# Altium PCB PCB1.PcbDoc
Units mil, origin at the board's own origin, x right, y up, seen from the top; angles counter-clockwise.
Board outline 2885 x 2364.99 mil, 2 copper layers (Top Layer, Bottom Layer); 71 components, 41 nets, 241 pads, 20 vias.
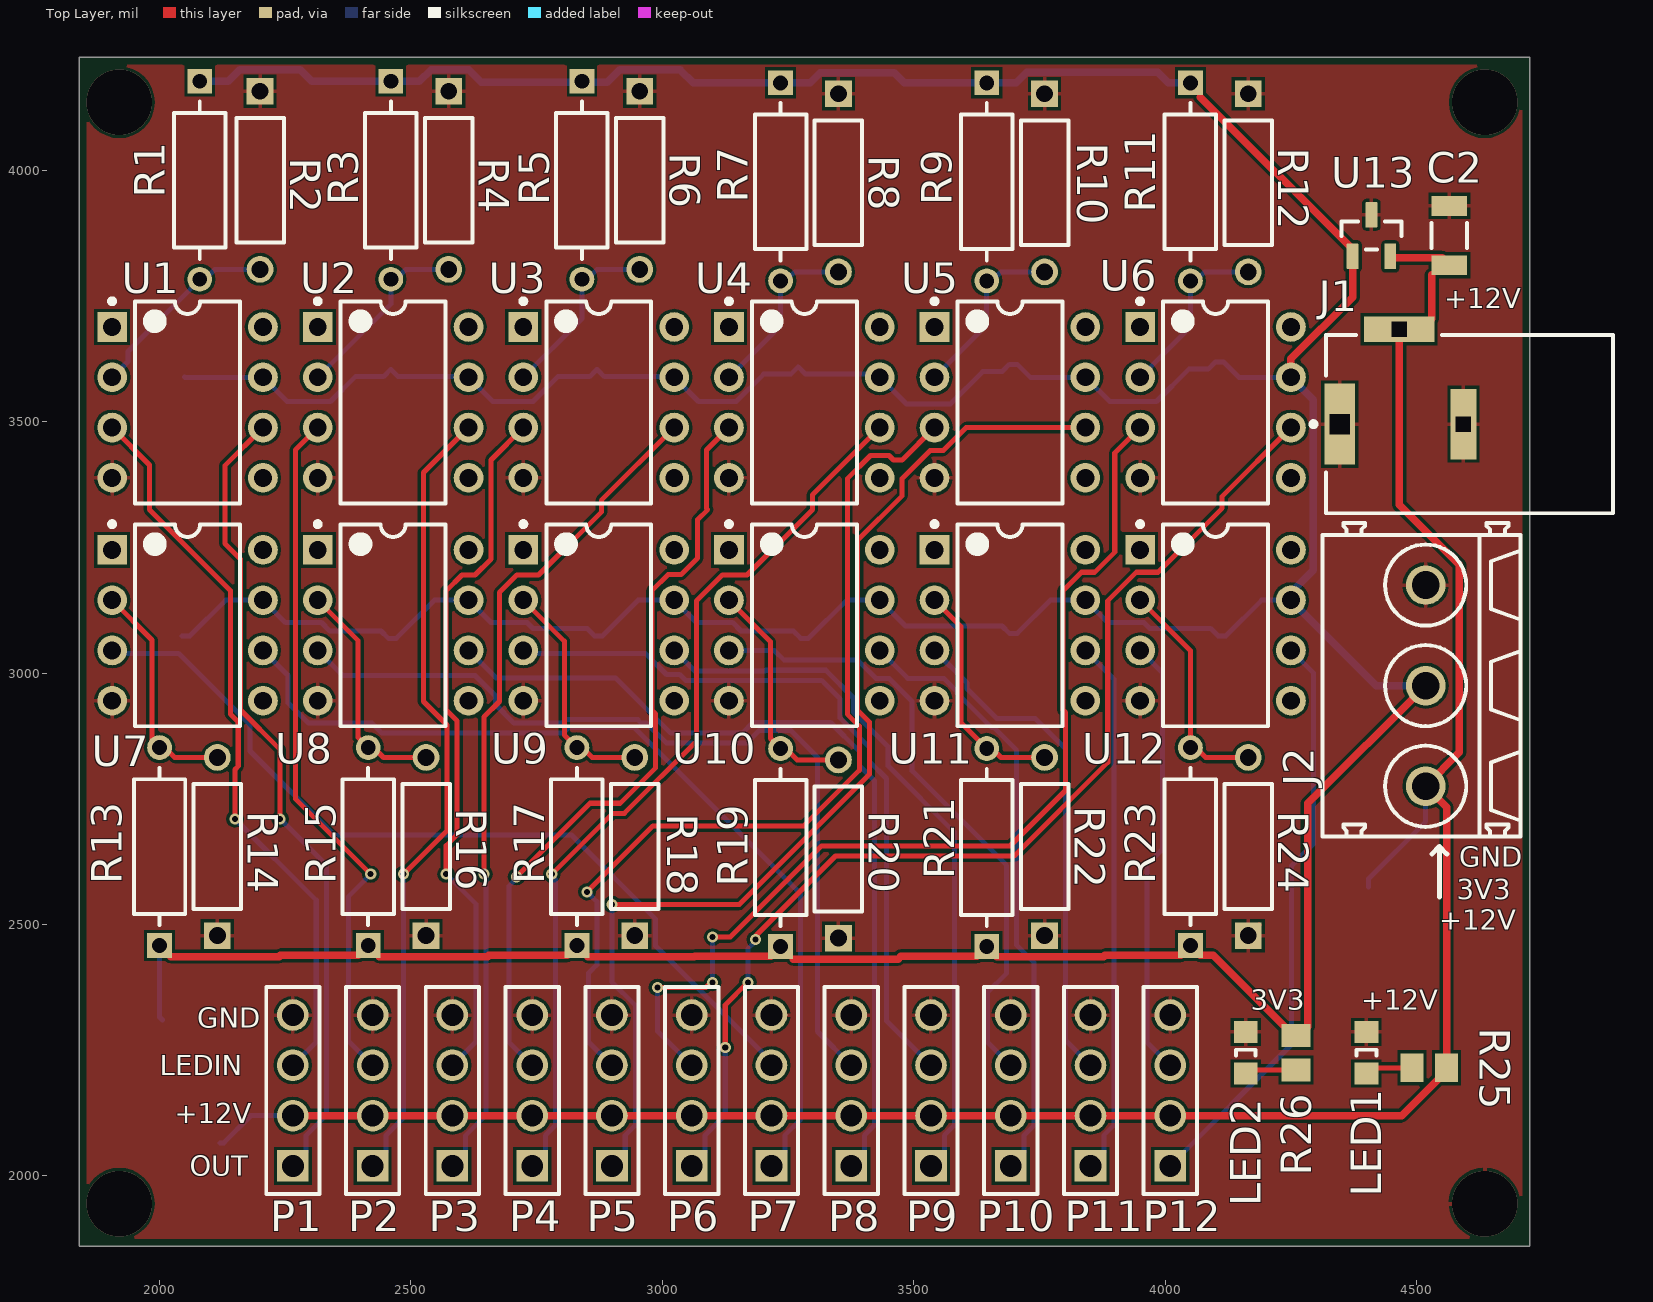
[diagram p0: Top Layer view]
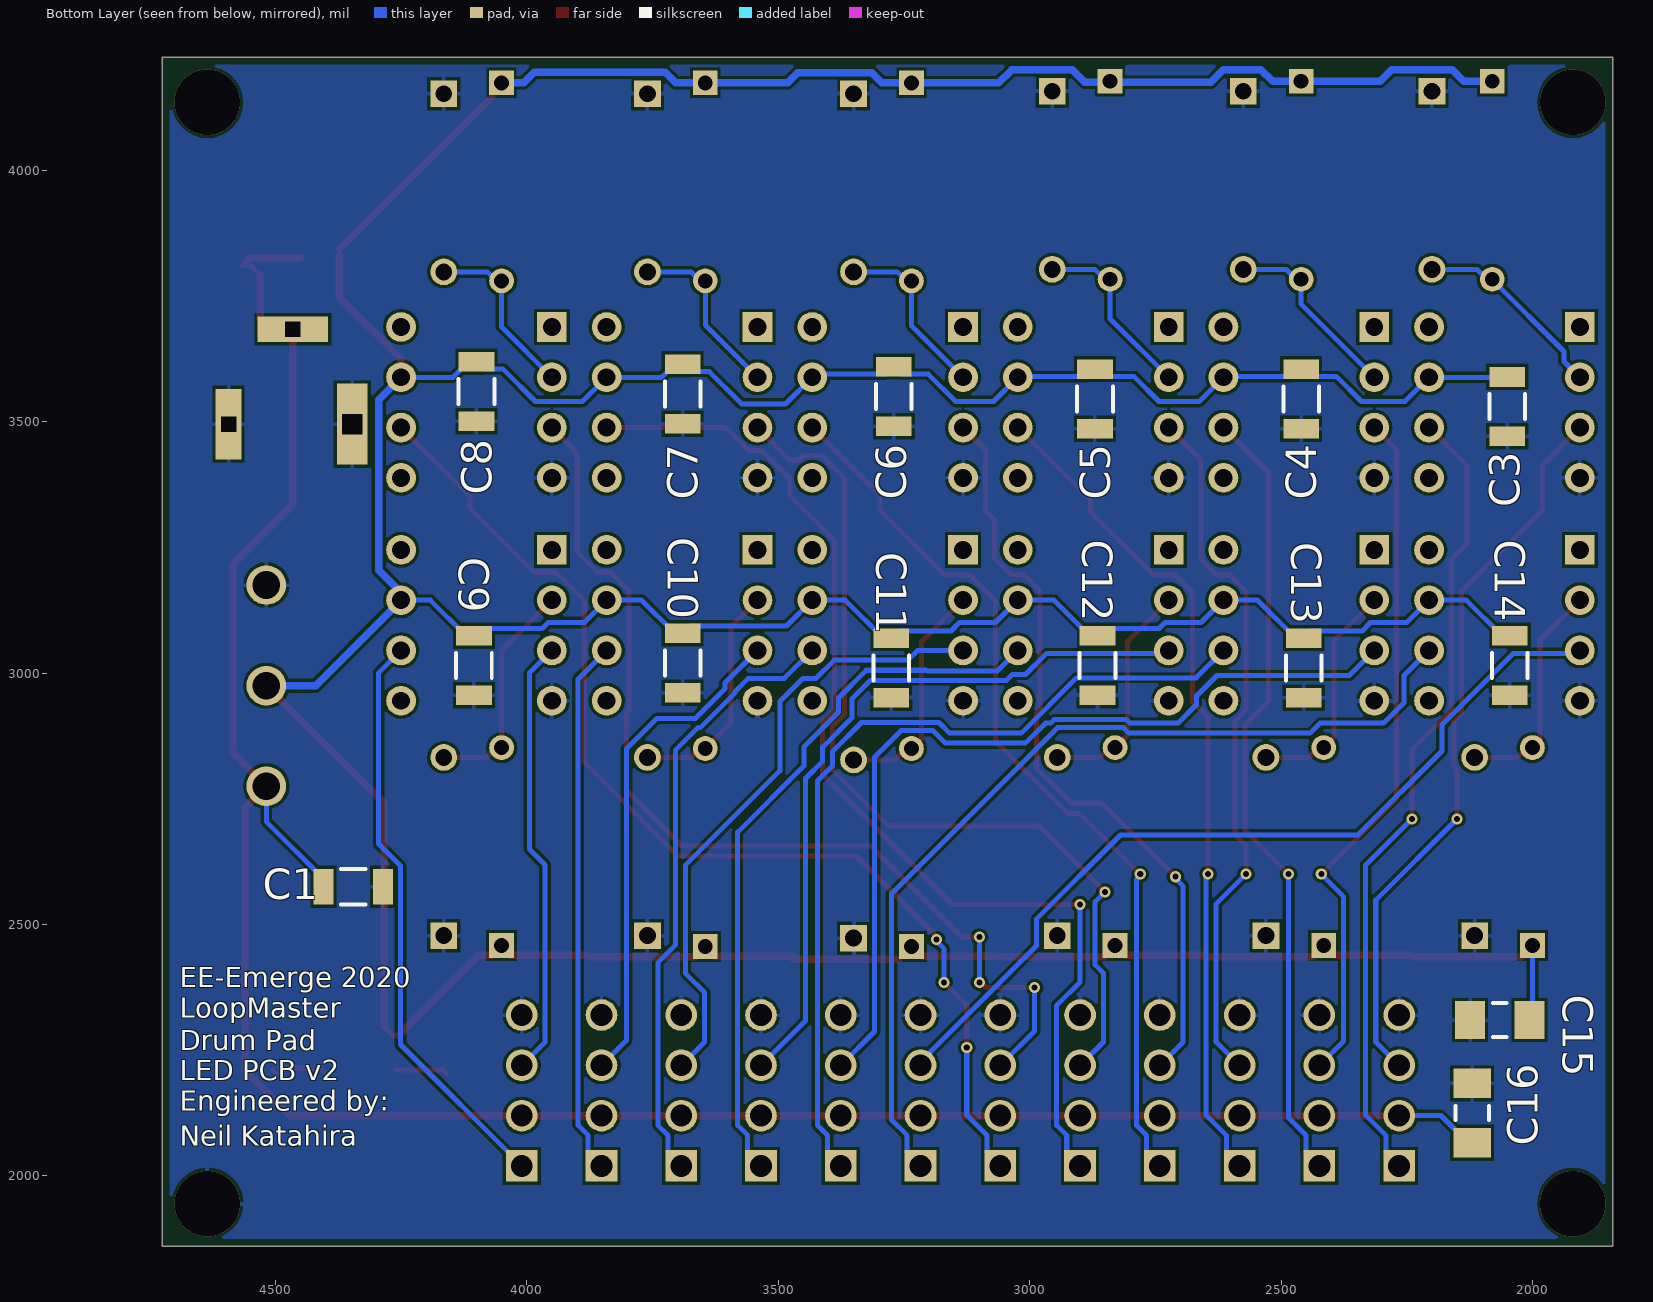
[diagram p1: Bottom Layer view, seen from below]
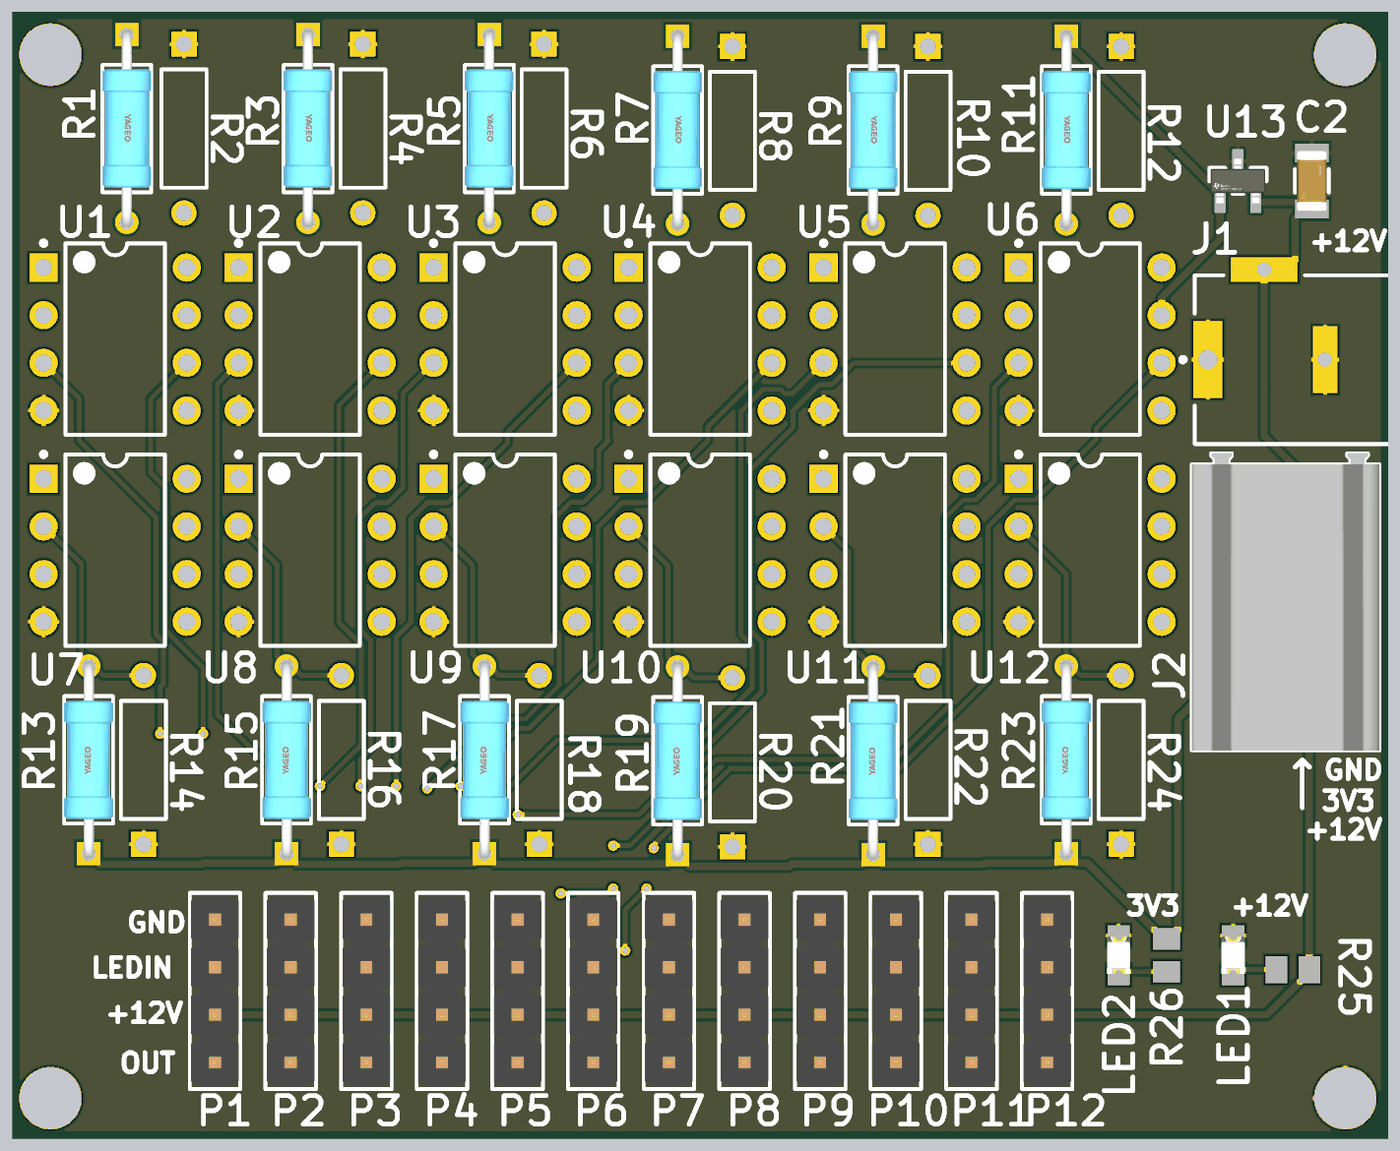
[diagram p2: 3D render of the assembled board from above, using the file's embedded part models]
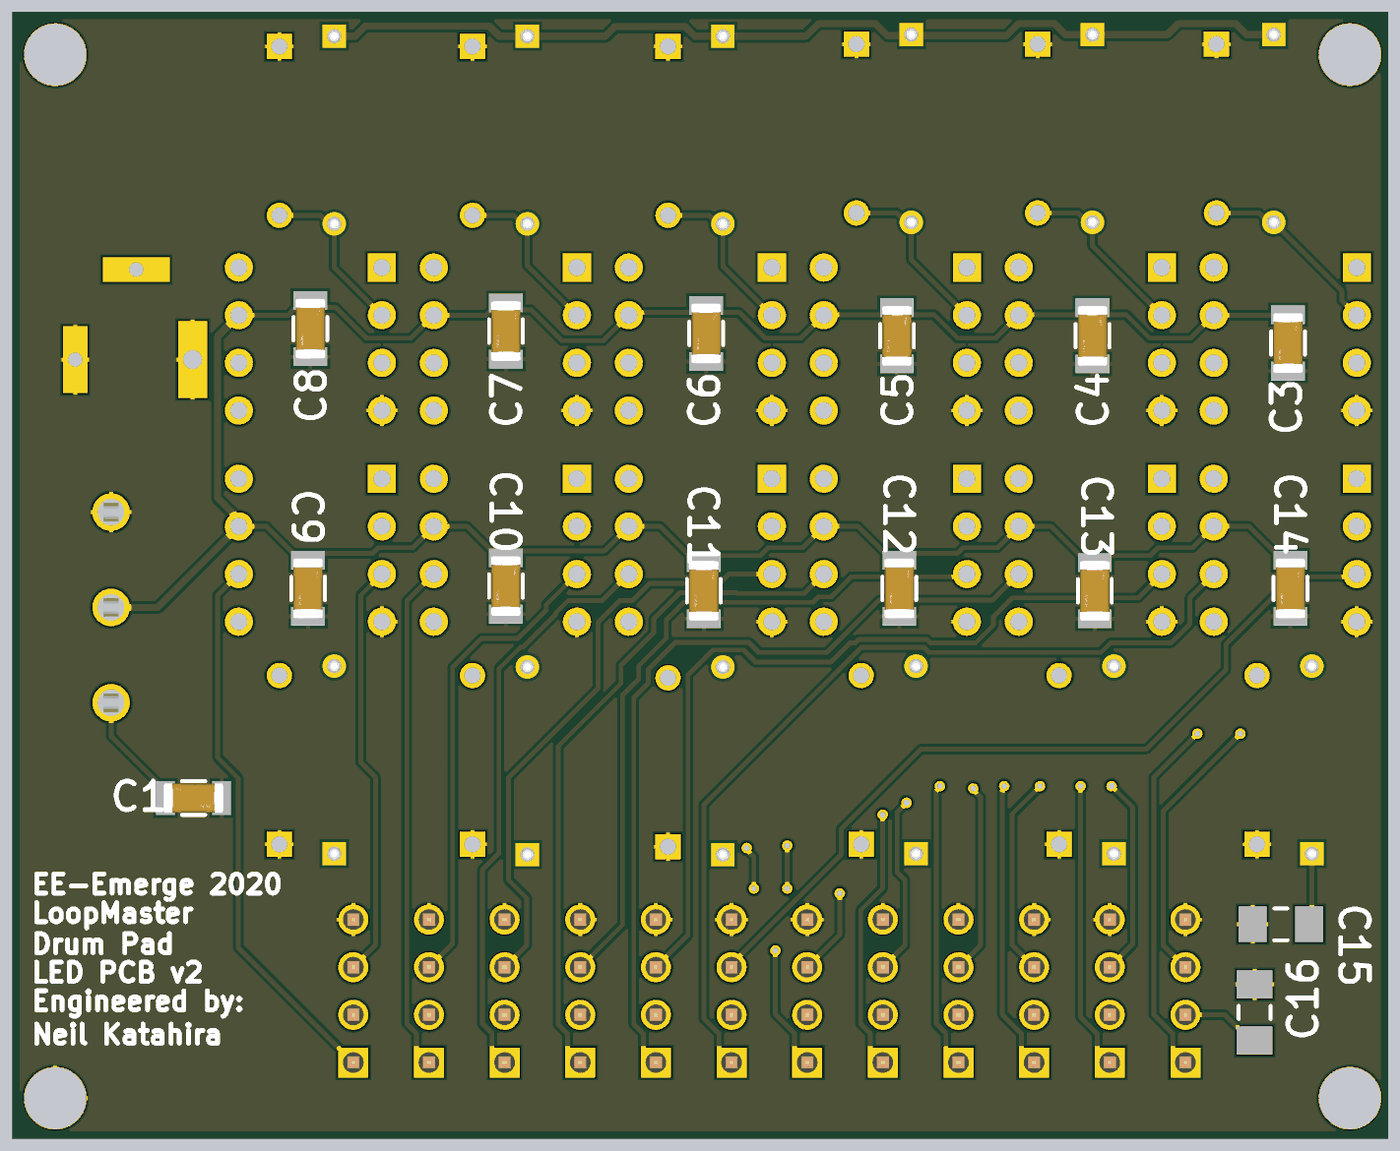
[diagram p3: 3D render of the assembled board from below, using the file's embedded part models]

## Layer stack, top to bottom
Top Solder: solder mask 0.4, Solder Resist, Dk 3.5
Top Layer: signal copper 1.4
Dielectric 1: dielectric 12.6, FR-4, Dk 4.8
Bottom Layer: signal copper 1.4
Bottom Solder: solder mask 0.4, Solder Resist, Dk 3.5

## Board outline
1840,4225 4725,4225 4725,1860.01 1840,1860.01

## Design rules (kind name [scope] priority, off if disabled: settings)
BoardOutlineClearance [All] p1: gap=15 ignorepadtopadclearanceinfootprint=FALSE
Clearance [All] p1: gap=6 ignorepadtopadclearanceinfootprint=FALSE except(0: Arc-Hole Track-Hole SMDPad-Hole THPad-Hole Via-Hole Fill-Hole Poly-Hole Region-Hole Text-Hole)
ComponentClearance [All] p1: gap=1 collisioncheckmode=3 verticalgap=1 showdistances=FALSE
DiffPairsRouting [All] p1: maxlimit=393.7 minlimit=6 mostfreqgap=8 toplayer_minwidth=6 toplayer_maxwidth=15 toplayer_prefwidth=8 bottomlayer_minwidth=6 bottomlayer_maxwidth=15 bottomlayer_prefwidth=8 maxuncoupledlength=500
HoleSize [All] p1: absolutevalues=TRUE maxlimit=265 minlimit=13 maxpercent=80.000 minpercent=20.000
HoleToHoleClearance [All] p1: gap=10 allowstackedmicrovias=FALSE
MinimumAnnularRing [All] p1: minimumring=7
MinimumSolderMaskSliver [All] p1: minsoldermaskwidth=0
PlaneClearance [All] p1: clearance=10
PlaneConnect [All] p1: planeconnectstyle=Direct reliefexpansion=16 reliefentries=4 reliefconductorwidth=6 reliefairgap=6
PolygonConnect [All] p1: connectstyle=Relief reliefconductorwidth=8 reliefentries=4 polygonreliefangle="90 Angle" airgapwidth=6
RoomDefinition Sheet4 [InComponentClass('Sheet4')] p1: confinementstyle=ConfineIn formatcopy=TRUE lockcomponents=FALSE outline 0,0 2000,0 2000,1000 0,1000
RoomDefinition Sheet2 [InComponentClass('Sheet2')] p2: confinementstyle=ConfineIn formatcopy=TRUE lockcomponents=FALSE outline 0,0 2000,0 2000,1000 0,1000
RoutingCorners [All] p1: cornerstyle=45-Degree minsetback=49.21 maxsetback=49.21
RoutingVias [All] p1: holewidth=15 width=30 viastyle="Through Hole" minholewidth=13 minwidth=27 maxholewidth=100 maxwidth=114
SilkToSilkClearance [All] p1: silktosilkclearance=0
SilkToSolderMaskClearance [IsPad] p1: minsilkscreentomaskgap=6 clearancetoexposedcopper=TRUE
SolderMaskExpansion [All] p1: expansion=2.95
Width [All] p1: maxlimit=400 minlimit=6 preferedwidth=8
20 further rules are at their usual default settings.

## Classes and differential pairs
component class Sheet4: C1 C2 C3 C4 C5 C6 C7 C8 C9 C10 C11 C12 C13 C14 C15 C16 J1 J2 LED1 LED2 P1 P2 P3 P4 P5 P6 P7 P8 P9 P10 P11 P12 R25 R26 U13
component class Sheet2: R1 R2 R3 R4 R5 R6 R7 R8 R9 R10 R11 R12 R13 R14 R15 R16 R17 R18 R19 R20 R21 R22 R23 R24 U1 U2 U3 U4 U5 U6 U7 U8 U9 U10 U11 U12

## Components (designator, comment, footprint, x,y, rotation, side; value= is the part's Value field where it differs from the comment)
C1 "CC1206KRX7R9BB104" FP-CC1206-1_25-MFG 4345,2575 r180 bottom value="100 nF"
C2 "CC1206KRX7R9BB104" FP-CC1206-1_25-MFG 4565,3870 r90 top value="100 nF"
C3 "CC1206KRX7R9BB104" FP-CC1206-1_25-MFG 2050,3530 r270 bottom value="100 nF"
C4 "CC1206KRX7R9BB104" FP-CC1206-1_25-MFG 2460,3545 r270 bottom value="100 nF"
C5 "CC1206KRX7R9BB104" FP-CC1206-1_25-MFG 2870,3545 r270 bottom value="100 nF"
C6 "CC1206KRX7R9BB104" FP-CC1206-1_25-MFG 3270,3550 r270 bottom value="100 nF"
C7 "CC1206KRX7R9BB104" FP-CC1206-1_25-MFG 3690,3555 r270 bottom value="100 nF"
C8 "CC1206KRX7R9BB104" FP-CC1206-1_25-MFG 4100,3560 r270 bottom value="100 nF"
C9 "CC1206KRX7R9BB104" FP-CC1206-1_25-MFG 4105,3015 r270 bottom value="100 nF"
C10 "CC1206KRX7R9BB104" FP-CC1206-1_25-MFG 3690,3020 r270 bottom value="100 nF"
C11 "CC1206KRX7R9BB104" FP-CC1206-1_25-MFG 3275,3010 r270 bottom value="100 nF"
C12 "CC1206KRX7R9BB104" FP-CC1206-1_25-MFG 2865,3015 r270 bottom value="100 nF"
C13 "CC1206KRX7R9BB104" FP-CC1206-1_25-MFG 2455,3010 r270 bottom value="100 nF"
C14 "CC1206KRX7R9BB104" FP-CC1206-1_25-MFG 2045,3015 r270 bottom value="100 nF"
C15 "C1206C106K4RACTU" CAPC3216X180X50ML20T25 2065,2310 r180 bottom
C16 "C1206C106K4RACTU" CAPC3216X180X50ML20T25 2120,2125 r270 bottom
J1 "RAPC722X" SWITCH-RAPC712X-3_V 4470,3495 r90 top
J2 "1716090000" LM_5_08_90_03 4510,2975 r90 top
LED1 "150080VS75000" 0805_A 4400,2245 r270 top
LED2 "150080RS75000" 0805_A 4160,2245 r270 top
P1 "61300411121" 61300411121 2265.16,2170 r90 top
P2 "61300411121" 61300411121 2423.78,2170 r90 top
P3 "61300411121" 61300411121 2582.4,2170 r90 top
P4 "61300411121" 61300411121 2741.02,2170 r90 top
P5 "61300411121" 61300411121 2899.65,2170 r90 top
P6 "61300411121" 61300411121 3058.27,2170 r90 top
P7 "61300411121" 61300411121 3216.89,2170 r90 top
P8 "61300411121" 61300411121 3375.51,2170 r90 top
P9 "61300411121" 61300411121 3534.13,2170 r90 top
P10 "61300411121" 61300411121 3692.76,2170 r90 top
P11 "61300411121" 61300411121 3851.38,2170 r90 top
P12 "61300411121" 61300411121 4010,2170 r90 top
R1 "MFR-25FBF52-1K18" FP-MFR-25-MFG 2080,3980 r270 top value=1.18kO
R2 "MFR-25FBF52-4K75" RESA60-630X240 2200,3980 r270 top
R3 "MFR-25FBF52-1K18" FP-MFR-25-MFG 2460,3980 r270 top value=1.18kO
R4 "MFR-25FBF52-4K75" RESA60-630X240 2575,3980 r270 top
R5 "MFR-25FBF52-1K18" FP-MFR-25-MFG 2840,3980 r270 top value=1.18kO
R6 "MFR-25FBF52-4K75" RESA60-630X240 2955,3980 r270 top
R7 "MFR-25FBF52-1K18" FP-MFR-25-MFG 3235,3976.85 r270 top value=1.18kO
R8 "MFR-25FBF52-4K75" RESA60-630X240 3350,3975 r270 top
R9 "MFR-25FBF52-1K18" FP-MFR-25-MFG 3645,3976.85 r270 top value=1.18kO
R10 "MFR-25FBF52-4K75" RESA60-630X240 3760,3975 r270 top
R11 "MFR-25FBF52-1K18" FP-MFR-25-MFG 4050,3976.85 r270 top value=1.18kO
R12 "MFR-25FBF52-4K75" RESA60-630X240 4165,3975 r270 top
R13 "MFR-25FBF52-1K18" FP-MFR-25-MFG 2000,2655 r90 top value=1.18kO
R14 "MFR-25FBF52-4K75" RESA60-630X240 2115,2655 r90 top
R15 "MFR-25FBF52-1K18" FP-MFR-25-MFG 2415,2655 r90 top value=1.18kO
R16 "MFR-25FBF52-4K75" RESA60-630X240 2530,2655 r90 top
R17 "MFR-25FBF52-1K18" FP-MFR-25-MFG 2830,2655 r90 top value=1.18kO
R18 "MFR-25FBF52-4K75" RESA60-630X240 2945,2655 r90 top
R19 "MFR-25FBF52-1K18" FP-MFR-25-MFG 3235,2653.15 r90 top value=1.18kO
R20 "MFR-25FBF52-4K75" RESA60-630X240 3350,2650 r90 top
R21 "MFR-25FBF52-1K18" FP-MFR-25-MFG 3645,2653.15 r90 top value=1.18kO
R22 "MFR-25FBF52-4K75" RESA60-630X240 3760,2655 r90 top
R23 "MFR-25FBF52-1K18" FP-MFR-25-MFG 4050,2655 r90 top value=1.18kO
R24 "MFR-25FBF52-4K75" RESA60-630X240 4165,2655 r90 top
R25 "ERJ-6GEYJ152V" RESC2013X70X40NL20T20 4525,2215 r0 top
R26 "ERJ-6GEYJ152V" RESC2013X70X40NL20T20 4260,2245 r90 top
U1 "LM741CN/NOPB" P0008A 2055.71,3538.23 r0 top
U2 "LM741CN/NOPB" P0008A 2464.57,3538.23 r0 top
U3 "LM741CN/NOPB" P0008A 2873.43,3538.23 r0 top
U4 "LM741CN/NOPB" P0008A 3282.28,3538.23 r0 top
U5 "LM741CN/NOPB" P0008A 3691.14,3538.23 r0 top
U6 "LM741CN/NOPB" P0008A 4100,3538.23 r0 top
U7 "LM741CN/NOPB" P0008A 2055.71,3095 r0 top
U8 "LM741CN/NOPB" P0008A 2464.57,3095 r0 top
U9 "LM741CN/NOPB" P0008A 2873.43,3095 r0 top
U10 "LM741CN/NOPB" P0008A 3282.28,3095 r0 top
U11 "LM741CN/NOPB" P0008A 3691.14,3095 r0 top
U12 "LM741CN/NOPB" P0008A 4100,3095 r0 top
U13 "TLV76033DBZT" FP-DBZ0003A-MFG 4410,3870 r90 top

## Footprints (in the part's own frame and the unit in brackets; to place one, negate y for a bottom-side part, rotate by r counter-clockwise, add the part's x,y. Pads: shape width x height; smd on the part's side, far side on the other; paste and mask are expansions set on the pad)
0805_A [mm] "Chip LED, 2-Leads, Body 2.0x1.3mm, IPC Medium Density"
  rect 1.1x1.2 smd: 1(-1.05,0) 2(1.05,0)
  silkscreen extent -0.15,-0.5 0.15,0.5, body extent -1,-0.62 1,0.63, height 0.68
61300411121 [mm] "Pin Header, pitch 2.54 mm, THT, Vertical, single row, 4p"
  rect 1.6x1.6 hole 1.1: 1(-3.81,0)
  round 1.6 hole 1.1: 2(-1.27,0) 3(1.27,0) 4(3.81,0)
  silkscreen extent -5.23,-1.35 5.23,1.35, body extent -5.08,-1.27 5.08,1.27, height 8.57
CAPC3216X180X50ML20T25 [mm] "Chip Capacitor, 2-Leads, Body 3.40x1.80mm, IPC Low Density"
  rect 1.5x1.9 smd: 1(-1.5,0) 2(1.5,0)
  silkscreen extent -0.35,-0.85 0.35,0.85, body extent -1.7,-0.9 1.7,0.9, height 1.8
FP-CC1206-1_25-MFG [mm]
  rect 1x1.8 smd paste+0 mask+0: 1(-1.5,0) 2(1.5,0)
  silkscreen extent -0.63,-0.9 0.63,0.9, body extent -1.6,-0.8 1.6,0.8, height 1.45
FP-DBZ0003A-MFG [mm]
  rrect17% 1.3x0.6 smd paste+0 mask+0: 1(-1.05,0.95) 2(-1.05,-0.95) 3(1.05,0)
  silkscreen extent -0.7,-1.52 0.7,1.52, body extent -1.8,-1.62 1.8,1.62, height 0.25
FP-MFR-25-MFG [mm]
  rect 1.25x1.25 hole 0.75 paste-1000 mask+0: 1(-5,0)
  round 1.25 hole 0.75 paste-1000 mask+0: 2(5,0)
  silkscreen extent -3.98,-1.3 3.98,1.3, body extent -5.72,-1.4 5.72,1.4, height 0.25
LM_5_08_90_03 [mm] "OMNIMATE Signal - Serie LM  LM 5.08/03/90 3.5"
  round 2 hole 1.4: A1(-5.08,-0.2) A2(0,-0.2) A3(5.08,-0.2)
  silkscreen extent -7.62,-5 8.22,5, body extent -7.62,-5 8.22,5, height 13.81
P0008A [mm] "DIP, 8-Leads, Body 10.15x6.6mm, Pitch 2.54mm"
  rect 1.5x1.5 hole 0.9: 1(-3.81,3.81)
  round 1.5 hole 0.9: 2(-3.81,1.27) 3(-3.81,-1.27) 4(-3.81,-3.81) 5(3.81,-3.81) 6(3.81,-1.27) 7(3.81,1.27) 8(3.81,3.81)
  silkscreen extent -3.93,-5.1 2.65,5.23, body extent -3.95,-5.07 3.95,5.07, height 5.08
RESA60-630X240 [mm] "Axial Resistor, 2-Leads, Dia 2.4mm, Body Length 6.3mm"
  rect 1.35x1.35 hole 0.85: 1(-4.5,0)
  round 1.35 hole 0.85: 2(4.5,0)
  silkscreen extent -3.15,-1.2 3.15,1.2, body extent -3.15,-1.2 3.15,1.2, height 2.4
RESC2013X70X40NL20T20 [mm] "Chip Resistor, 2-Leads, Body 2.00x1.25mm, IPC Medium Density"
  rect 1.15x1.45 smd: 1(-0.875,0) 2(0.875,0)
  body extent -1.1,-0.72 1.1,0.72, height 0.7
SWITCH-RAPC712X-3_V [mm] "CONN, 3-Leads, Body 14.5x9mm"
  rect 4.1x1.55 hole 1.01 square: 1(0,3.125)
  rect 3.55x1.3 hole 0.76 square: 2(0,-3.125)
  rect 1.3x3.55 hole 0.76 square: 3(4.8,0.125)
  silkscreen extent -4.5,-10.68 4.5,4.57, body extent -4.5,-10.68 4.5,3.83, height 11

## Part data
C1 C2 C3 C4 C5 C6 C7 C8 C9 C10 C11 C12 C13 C14: library part CMP-03422-000842-1, "CAP CER 0.1UF 50V X7R 1206", Capacitance="100 nF", Manufacturer=Yageo, Package=CC1206-1.25, Temperature="-55°C to +125°C", Temperature Characteristic=X7R, Temperature Coefficient=15%, Temperature Range High=+125°C, Temperature Range Low=-55°C, Tolerance=0.1, Voltage Rating="50 V", Automotive=No, Automotive Grade=NA, Category=Cap, ComponentLink2Description=Datasheet, ComponentLink2URL=http://www.yageo.com/documents/recent/UPY-NP0X7R_HV_1KV-to-3KV_11.pdf, Device Class L1="Passive Components", Device Class L2=Capacitors, Device Class L3="Ceramic Capacitors", Digikey Description="CAP CER 0.1UF 50V X7R 1206", Footprint Url=http://www.yageo.com/exep/pages/download/literatures/UPY-C_GEN_24.pdf, Height=1.45mm, Lead Free=Yes, Manufacturer Part Number=CC1206KRX7R9BB104, Material=Ceramic, Mouser Description="Multilayer Ceramic Capacitors MLCC - SMD/SMT 100nF 50V X7R 10%", Octopart=https://octopart.com/cc1206krx7r9bb104-yageo-39467816, RoHS=TRUE
C15 C16: library part CMP-1664-00006-1, "CAP, Ceramic, 10 uF, +/- 10%, 16 V, -55 to 125 degC, 1206 (3216 Metric), RoHS, Tape and Reel", Capacitance="8.2 pF", Case\Package=0603, Case Code (Metric)=1608, Max Operating Temperature="125 degC", Min Operating Temperature="-55 degC", Package Quantity=4000, Tolerance=5%, Type (Capacitors)=C0G, Voltage Rating="50 V", Case Code (Imperial)=0603, ComponentLink1Description="Manufacturer URL", ComponentLink1URL=http://www.kemet.com/, ComponentLink2Description=Datasheet, ComponentLink2URL=http://capacitoredge.kemet.com/capedge2/DataSheet/Datasheet-C1206C106K4RACTU.pdf?pn=C1206C106K4RACTU, DatasheetVersion=Aug-16, Height="0.8 mm", Length="1.6 mm", Mount="Surface Mount", PackageDescription="2-Pin Surface Mount Device, Body 3.2 x 1.6 mm", PackageReference=1206, Packaging="Tape and Reel", Pins=2, Radiation Hardening=No, REACH SVHC="No SVHC", RoHSCompliant=true, Voltage Rating (DC)="50 V", Width="0.8 mm"
J1: library part CMP-2000-05384-1, "Power Jack, 5 A, 3-Pin THD, RoHS, Bulk", Color=Black, Current Rating=5A, Manufacturer=Switchcraft, Standard Package=2,500, Catalog Drawings="RAPC7(1,2)2XSide /  / RAPC7(1,2)2XTop", Category=Connectors,Interconnects, Connector Type=Jack, Contact Material=Brass, Contact Material - Plating=Nickel, Datasheet URL=http://www.mouser.com/ds/2/393/rapc722x_cd-371352.pdf, Datasheet Version="Rev. A, 08/2005", Dynamic Catalog=SwitchcraftInc, Family=Barrel-PowerConnectors, Gender=Male, Housing Color=Black, Housing Material=Thermoplastic, Internal Switch(s)=SingleSwitch,NormallyClosed, Manufacturer URL=http://www.switchcraft.com/, Mating Products="S765-ND / -CONNPLUGMINIPWR2CONDWHT/RED / S760K-ND / -CONNPOWERPLUGMINI.08\"BLACK / SC1052-ND / -CONNPOWERPLUGMINIBLACK", Mounting Type=ThroughHole,RightAngle, Number of Positions/Contacts=2Conductors,2Contacts, Other Names="Q2287470A / RAPC722X-ND / SC1313", Plug/Mating Plug Diameter=2.1mmID,5.5mmOD, RoHS Information=SwitchcraftRoHSInfo, Shielding=Unshielded, Termination=SolderEyelet(s)
J2: library part CMP-1559-01768-1, "OMNIMATE Signal - series LM", Colour=Orange, Manufacturer=Weidmueller, Rated_current_use_group_B_UL_1059="15 A", Rated_voltage_for_surge_voltage_class_pollution_degree_II_2="630 V", Rated_voltage_use_group_B_UL_1059="300 V", UL_94_flammability_rating=V-0, ComponentLink1Description="Manufacturer URL", ComponentLink1URL=http://www.weidmueller.com/, ComponentLink2Description="URL Link1", ComponentLink2URL=http://catalog.weidmueller.com/catalog/Start.do?localeId=en&ObjectID=1716090000, Contact_material=Cu-Leg, Contact_surface=tinned, Insulating_material="Wemid (PA)", Mounting_onto_the_PCB="Solder connection", No_of_poles=3, PackageReference=LM_5_08_90_03, Packaging=Box, PartNumber=1716090000, Pitch_inch="0,2 inch", Pitch_mm="5,08 mm", Qty="500 PCS", Revision=V1, Short_text_for_material="LM 5.08/03/90 3.5SN OR BX", Side_termination_characteristic="closed side", Solder_pin_length_mm="3,5 mm", Solid_max_H05_07_V_U="2,5 mm²", Solid_min_H05_07_V_U="0,2 mm²", Wire_cross_section_AWG_max_UL_1059="AWG 14", Wire_cross_section_AWG_min_UL_1059="AWG 24"
LED1: library part CMP-1426-00009-1, "SMD mono-color Chip LED, WL-SMCW, Bright Green", Color="Bright Green", Manufacturer="Wuerth Elektronik", ComponentLink1Description="Manufacturer URL", ComponentLink1URL=http://www.we-online.com, ComponentLink2Description=Datasheet, ComponentLink2URL=http://katalog.we-online.com/led/datasheet/150080VS75000.pdf, PackageReference=0805_A, PartNumber=150080VS75000
LED2: library part CMP-1426-00011-1, "SMD mono-color Chip LED, WL-SMCW, Red", Color=Red, Manufacturer="Wuerth Elektronik", ComponentLink1Description="Manufacturer URL", ComponentLink1URL=http://www.we-online.com, ComponentLink2Description=Datasheet, ComponentLink2URL=http://katalog.we-online.com/led/datasheet/150080RS75000.pdf, PackageReference=0805_A, PartNumber=150080RS75000
P1 P2 P3 P4 P5 P6 P7 P8 P9 P10 P11 P12: library part CMP-1502-01064-1, "THT Vertical Pin Header WR-PHD, Pitch 2.54 mm, Single Row, 4 pins", Contact Resistance=20mOhm, Manufacturer="Wurth Elektronik", Operating Temperature=-40to105degC, Rated Current=3A, Withstanding Voltage=500VAC, Working Voltage=250VAC, Datasheet URL=https://katalog.we-online.de/em/datasheet/6130xx11121.pdf, Gender=Male, Manufacturer URL=http://www.we-online.de, Mounting Technology=THT, Orientation=Vertical, Package Reference=61300411121, Packaging=Bag, Part Number=61300411121, Pin Number=4, Pitch=2.54mm, Publisher=WurthElektronik, Row Number=Single
R1 R3 R5 R7 R9 R11 R13 R15 R17 R19 R21 R23: library part CMP-03413-000001-1, "RES 1.18K OHM 1/4W 1% AXIAL", Manufacturer=Yageo, Package=MFR-25, Power Rating=0.25W, Resistance=1.18kO, Temperature="-55°C to +155°C", Temperature Coefficient=100ppm/°C, Temperature Range High=+155°C, Temperature Range Low=-55°C, Tolerance=1%, Voltage Rating=250V, Automotive=No, Category=Res, ComponentLink2Description=Datasheet, ComponentLink2URL=https://www.yageo.com/upload/media/product/products/datasheet/lr/Yageo_LR_MFR_1.pdf, Composition="Metal Film", Device Class L1="Passive Components", Device Class L2=Resistors, Device Class L3="Through-Hole Resistors", Digikey Description="RES 1.18K OHM 1/4W 1% AXIAL", Height=2.6mm, Ipc Land Pattern Name=RESAD1000W75L680D260, Lead Free=Yes, Manufacturer Part Number=MFR-25FBF52-1K18, Mouser Description="Metal Film Resistors 1.18K OHM 1/4W 1%", Octopart=https://octopart.com/mfr-25fbf52-1k18-yageo-56251681, RoHS=TRUE, Series=MFR
R2 R4 R6 R8 R10 R12 R14 R16 R18 R20 R22 R24: library part CMP-1659-00066-1, "Axial Resistor, 4.75 KOhm, +/- 1%, 0.25 W, -55 to 155 degC, 2-Pin THD, RoHS, Bulk", Capacitance="22 uF", Case\Package=1210, Case Code (Metric)=3225, Max Operating Temperature="125 degC", Min Operating Temperature="-55 degC", Package Quantity=1000, Tolerance=10%, Type (Capacitors)=X7R, Voltage Rating="25 V", Case Code (Imperial)=1210, ComponentLink1Description="Manufacturer URL", ComponentLink1URL=http://www.yageo.com/, ComponentLink2Description=Datasheet, ComponentLink2URL=http://www.yageo.com/documents/recent/Yageo%20LR_MFR_2013.pdf, DatasheetVersion=Apr-13, Height="2.5 mm", Length="3.2 mm", Mount="Surface Mount", PackageDescription="2-Pin Axial Lead, Dia 2.4 mm, Body Length 6.3 mm", PackageReference=MFR-25, Packaging="Tape and Reel", Pins=2, Radiation Hardening=No, REACH SVHC="No SVHC", RoHSCompliant=true, Voltage Rating (DC)="25 V", Width="2.5 mm"
R25 R26: library part CMP-2001-00355-1, Manufacturer=Panasonic, Part Number=ERJ-6GEYJ152V
U1 U2 U3 U4 U5 U6 U7 U8 U9 U10 U11 U12: library part CMP-0055-00162-3, "Operational Amplifier, 8-pin MDIP, Pb-Free", Manufacturer="Texas Instruments", Package Reference=P0008A, PackageTopMarking=NSUZXYTTE#*LM*741CN, PowerWise=N, Code_JEDEC=MS-001-BA, ComponentLink1Description="Datasheet URL", ComponentLink1URL=http://www.ti.com/general/docs/lit/getliterature.tsp?genericPartNumber=LM741&fileType=pdf, CompType=Amplifiers, PackageDescription="MDIP, .365 x .250 x .130in, 8 Lead, .100in Pitch", PinCount=8, RoHS=Y
U13: library part CMP-04917-000033-1, "IC REG LINEAR 3.3V 100MA SOT23-3", Dropout Voltage=0.9V, Manufacturer="Texas Instruments", Max Junction Temp=+125°C, Max Supply Voltage=30V, Min Supply Voltage=4.2V, Nominal Supply Current=2mA, Output Current=100mA, Output Voltage=3.3V, Package=DBZ0003A, Temperature="-40°C to +125°C", Temperature Range Low=-40°C, Accuracy Percentage=4%, Automotive=No, Category=IC, ComponentLink2Description=Datasheet, ComponentLink2URL=http://www.ti.com/lit/ds/symlink/tlv760.pdf, Device Class L1="Integrated Circuits (ICs)", Device Class L2="Power Management ICs", Device Class L3="Voltage Regulators - Linear", Digikey Description="IC REG LINEAR 3.3V 100MA SOT23-3", Height=1.12mm, Ipc Land Pattern Name=SOT95P237X112-3, Lead Free=Yes, Manufacturer Part Number=TLV76033DBZT, Number Of Outputs=1, Octopart=https://octopart.com/tlv76033dbzt-texas+instruments-84619834, Output Type=Fixed, RoHS=TRUE, Standoff Height=0.01mm, Temperature Range High=+125°C

## Via types
v1: diameter 22, hole 12, Top Layer to Bottom Layer, 16 vias
v2: diameter 130, hole 130, Top Layer to Bottom Layer, 4 vias

## Nets (pads, with @x,y where several pads share a name; then routed paths per layer and width w, separated by ;. In a path a pad name is that pad's centre, name@x,y a point inside that pad or via, vN(x,y) a via of type N, cw(c..) or ccw(c..) an arc to the next point about the centre after c; other vN are vias at no path point)
3V3: C3.1 C4.1 C5.1 C6.1 C7.1 C8.1 C9.1 C10.1 C11.1 C12.1 C13.1 C14.1 C15.2 J2.A2 R1.1 R3.1 R5.1 R7.1 R9.1 R11.1 R13.1 R15.1 R17.1 R19.1 R21.1 R23.1 R26.2 U1.7 U2.7 U3.7 U4.7 U5.7 U6.7 U7.7 U8.7 U9.7 U10.7 U11.7 U12.7 U13.1 | length 12086.5
  Top Layer w10: R13.1 R13.1@2021.89,2436.26 ; 2237.66,2436.26 2239.94,2438.54 ; R15.1@2395.39,2438.54 R15.1 R15.1@2436.89,2436.26 ; 2652.66,2436.26 2654.94,2438.54 ; R17.1@2810.39,2438.54 R17.1 R17.1@2851.89,2436.26 ; 3063.59,2436.26 3064.02,2436.69 ; R19.1@3215.39,2436.69 R19.1 3260.04,2431.26 ; R21.1@3625.39,2436.69 R21.1 R21.1@3665.04,2436.26 ; 3877.66,2436.26 3879.94,2438.54 ; R23.1@4030.39,2438.54 R23.1 R23.1@4069.61,2438.54 ; R11.1 4069.61,4154.09 4069.61,4145.43 ; R26.2@4254.09,2279.45 R26.2 4265.91,2279.45 R26.2@4283.54,2297.09 ; U13.1 U13.1@4372.6,3842.44
  Top Layer w15: R13.1@2021.89,2436.26 2237.66,2436.26 ; 2239.94,2438.54 R15.1@2395.39,2438.54 ; R15.1@2436.89,2436.26 2652.66,2436.26 ; 2654.94,2438.54 R17.1@2810.39,2438.54 ; R17.1@2851.89,2436.26 3063.59,2436.26 ; 3064.02,2436.69 R19.1@3215.39,2436.69 ; 3260.04,2431.26 3468.59,2431.26 3474.02,2436.69 R21.1@3625.39,2436.69 ; R21.1@3665.04,2436.26 3877.66,2436.26 ; 3879.94,2438.54 R23.1@4030.39,2438.54 ; R23.1@4069.61,2438.54 4095,2438.54 R26.2@4254.09,2279.45 ; 4069.61,4145.43 U13.1@4372.6,3842.44 ; U6.7 4250,3625 4372.6,3747.6 U13.1 ; R26.2@4283.54,2297.09 4283.54,2740.67 J2.A2
  Bottom Layer w10: R13.1@2001.85,2460 R13.1 2000,2315.94 C15.2 ; C14.1 2060.75,3074.06 2131.69,3145 U7.7 2250.24,3100.47 2322.07,3100.47 2338.8,3083.74 2440.31,3083.74 C13.1 2470.75,3069.06 2546.69,3145 U8.7 2659.09,3100.47 2730.92,3100.47 2742.66,3088.74 2850.31,3088.74 C12.1 2880.75,3074.06 2951.69,3145 U9.7 3067.95,3100.47 3139.78,3100.47 3156.51,3083.74 3260.31,3083.74 C11.1 3290.75,3069.06 3366.69,3145 U10.7 3483.54,3093.74 3675.31,3093.74 C10.1 3705.75,3079.06 3771.69,3145 U11.7 3885.67,3100.47 3957.5,3100.47 3969.23,3088.74 4090.31,3088.74 C9.1 4120.75,3074.06 4191.69,3145 U12.7 U12.7@4257.5,3152.5 ; C3.1 2050.83,3588.23 U1.7 2253.94,3540 2340.1,3540 2389.47,3589.37 2445.31,3589.37 C4.1 2474.69,3589.37 2613.43,3589.37 U2.7 2662.8,3540 2742.6,3540 2791.97,3589.37 2855.31,3589.37 C5.1 2884.69,3589.37 3022.28,3589.37 U3.7 3071.65,3540 3147.03,3540 3201.4,3594.37 3255.31,3594.37 C6.1 3284.69,3594.37 3426.14,3594.37 U4.7 3485.51,3535 3572.6,3535 3636.97,3599.37 3675.31,3599.37 C7.1 3705.75,3614.06 3731.57,3588.23 U5.7 3889.37,3540 3982.6,3540 4046.97,3604.37 4085.31,3604.37 C8.1 4115.75,3619.06 4146.57,3588.23 U6.7 ; R15.1 R15.1@2416.85,2460 ; R17.1 R17.1@2831.85,2460 ; R5.1@2838.15,4175 R5.1 R5.1@2841.85,4175 ; R19.1@3233.7,2455 R19.1 R19.1@3236.3,2455 ; R21.1@3643.7,2455 R21.1 R21.1@3646.3,2455 ; J2.A2@4512.48,2969.61 J2.A2
  Bottom Layer w15: R1.1 2136.85,4176.85 2160,4200 2280,4200 2303.15,4176.85 R3.1 2516.85,4176.85 2540,4200 2615,4200 2640,4175 R5.1@2838.15,4175 ; R5.1@2841.85,4175 2890,4175 2915,4200 3035,4200 3061.3,4173.7 R7.1 3293.7,4173.7 3313.74,4193.74 3461.26,4193.74 3481.3,4173.7 R9.1 3703.7,4173.7 3725,4195 3985,4195 4006.3,4173.7 R11.1 ; U12.7 4420,2975 J2.A2 ; U6.7 4294.53,3543.7 4294.53,3204.53 4257.5,3167.5 U12.7@4257.5,3152.5
+12: C1.1 C2.1 C16.2 J1.3 J2.A1 P1.2 P2.2 P3.2 P4.2 P5.2 P6.2 P7.2 P8.2 P9.2 P10.2 P11.2 P12.2 R25.2 U13.2 | length 4643.9
  Top Layer w10: U13.2 U13.2@4450.43,3825.63 ; J1.3 4509.37,3683.98 J1.3@4529.96,3704.57 ; C2.1@4529.96,3791.65 4549.25,3810.94 C2.1 C2.1@4550.31,3825.63 ; R25.2@4559.45,2209.09 R25.2
  Top Layer w15: P1.2 P2.2 P3.2 P4.2 P5.2 P6.2 P7.2 P8.2 P9.2 P10.2 P11.2 P12.2 4470.35,2120 R25.2@4559.45,2209.09 ; U13.2@4450.43,3825.63 C2.1@4550.31,3825.63 ; J1.3 4465.08,3334.92 4585,3215 4585,2842.13 J2.A1 4559.45,2733.43 R25.2 ; J1.3@4529.96,3704.57 C2.1@4529.96,3791.65
  Bottom Layer w10: C16.2 2127.87,2065.94 2181.93,2120 P1.2 ; C1.1 4404.06,2590.75 4517.87,2704.57 J2.A1
GND: C1.2 C2.2 C3.2 C4.2 C5.2 C6.2 C7.2 C8.2 C9.2 C10.2 C11.2 C12.2 C13.2 C14.2 C15.1 C16.1 J1.1 J1.2 J2.A3 LED1.1 LED2.1 P1.4 P2.4 P3.4 P4.4 P5.4 P6.4 P7.4 P8.4 P9.4 P10.4 P11.4 P12.4 R2.1 R4.1 R6.1 R8.1 R10.1 R12.1 R14.1 R16.1 R18.1 R20.1 R22.1 R24.1 U1.4 U2.4 U3.4 U4.4 U5.4 U6.4 U7.4 U8.4 U9.4 U10.4 U11.4 U12.4 U13.3 | length 41.9
  Top Layer w10: P12.4 P12.4@4010,2322.83 ; R24.1 R24.1@4186.57,2499.41
  Bottom Layer w10: C15.1@2120,2305.94 C15.1 ; P12.4 P12.4@4010,2322.83
  other v2: 4635,1945
LEDIN_1: P1.3 U1.3 | length 1471.7
  Top Layer w10: U1.3 1980,3413.94 1980,3325 2141.18,3163.82 2141.18,2918.27 2156.57,2902.88 2156.57,2814.94 2150,2808.37 v1(2150,2710)
  Bottom Layer w10: U1.3 U1.3@1913.21,3480.73 ; v1(2150,2710) 2311.65,2548.35 2311.65,2266.5 P1.3
LEDIN_2: P2.3 U2.3 | length 1387.3
  Top Layer w10: U2.3 2270,3443.66 2270,2750 v1(2420,2600)
  Bottom Layer w10: v1(2420,2600) 2375.39,2555.39 2375.39,2268.39 P2.3
LEDIN_3: P3.3 U3.3 | length 1408.5
  Top Layer w10: v1(2570,2600) 2570,2656.72 2591.57,2678.29 2591.57,2905.02 2570.04,2926.56 2570.04,3163.44 2601.6,3195 2627.54,3195 2659.09,3226.56 2659.09,3423.9 U3.3
  Bottom Layer w10: v1(2570,2600) 2628.9,2541.1 2628.9,2266.5 P3.3
LEDIN_4: P4.3 U4.3 | length 1527.4
  Top Layer w10: v1(2710,2595) 2856.15,2741.15 2916.15,2741.15 2986.57,2811.57 2986.57,2918.88 2978.9,2926.56 2978.9,3163.44 3011.48,3196.02 3037.42,3196.02 3070,3228.6 3070,3305 3090,3325 3087.76,3327.24 3087.76,3443.7 U4.3
  Bottom Layer w10: v1(2710,2595) 2710,2591.75 2694.53,2576.28 2694.53,2266.5 P4.3
LEDIN_5: P5.3 U5.3 | length 1833.6
  Top Layer w10: v1(2850,2565) 2981.15,2696.15 3281.15,2696.15 3391.57,2806.57 3391.57,2894.45 3367.76,2918.27 3367.76,3386.67 3413.84,3432.76 3450.73,3432.76 3459.59,3423.9 3476.81,3423.9 U5.3
  Bottom Layer w10: v1(2850,2565) 2869.61,2545.39 2869.61,2419.72 2853.15,2403.26 2853.15,2266.5 P5.3
LEDIN_6: P6.3 U6.3 | length 2012.2
  Top Layer w10: v1(2990,2375) 3086.75,2375 3096.75,2385 v1(3100,2385) ; v1(3100,2475) 3135,2475 3316.15,2656.15 3691.15,2656.15 3801.57,2766.57 3801.57,2921.6 3796.61,2926.56 3796.61,3163.44 3833.64,3200.47 3859.59,3200.47 3899.6,3240.49 3899.6,3437.83 U6.3
  Bottom Layer w10: v1(2990,2375) 2990,2288.27 P6.3 ; v1(3100,2385) v1(3100,2475)
LEDIN_7: P7.3 U7.3 | length 1718.9
  Bottom Layer w10: U7.3 1911.34,3039.37 2037.91,3039.37 2180,2897.28 2180,2845 2347.19,2677.81 2819.39,2677.81 2986.57,2510.62 2986.57,2457.45 3216.89,2227.13 P7.3
LEDIN_8: P8.3 U8.3 | length 1758.8
  Bottom Layer w10: U8.3 2364.51,2995.06 2627.48,2995.06 2668.03,2954.51 2668.03,2937.42 2704.98,2900.47 2799.98,2900.47 2806.97,2907.46 2951.13,2907.46 2958.12,2900.47 2968.52,2900.47 3008.52,2860.47 3167.3,2860.47 3192.43,2885.61 3255.41,2885.61 3308.39,2832.62 3308.39,2287.12 P8.3
LEDIN_9: P9.3 U9.3 | length 1473.5
  Bottom Layer w10: U9.3 2729.06,3039.37 2966.08,3039.37 3008.38,2997.08 3034.32,2997.08 3045.77,2985.63 3316.65,2985.63 3325.43,2976.84 3353.64,2948.64 3353.64,2910.61 3411.57,2852.67 3411.57,2824.39 3445.61,2790.35 3445.61,2308.53 P9.3
LEDIN_10: P10.3 U10.3 | length 1243
  Bottom Layer w10: U10.3 3222.72,3045 3242.09,3025.63 3388.68,3025.63 3424.68,2989.63 3450.63,2989.63 3496.61,2943.64 3496.61,2805.66 3684.61,2617.67 3684.61,2403.15 3646.26,2364.8 3646.26,2266.5 P10.3
LEDIN_11: P11.3 U11.3 | length 998.2
  Bottom Layer w10: U11.3 3605.67,2980.47 3605.67,2968.94 3664.61,2910 3740.96,2910 3801.57,2849.39 3801.57,2269.8 P11.3
LEDIN_12: P12.3 U12.3 | length 875.6
  Bottom Layer w10: U12.3 3994.53,3000.47 3994.53,2649.53 3963.5,2618.51 3963.5,2266.5 P12.3
LEDOUT_1: P1.1 U1.6 | length 1621.3
  Top Layer w10: U1.6 2130,3412.52 2130,3257.74 2161.18,3226.56 2161.18,2926.56 2240,2847.74 v1(2240,2710)
  Bottom Layer w10: U1.6@2198.21,3480.73 U1.6 ; v1(2240,2710) 2331.65,2618.35 2331.65,2120.74 2291.65,2080.74 2291.65,2046.5 P1.1
LEDOUT_2: P2.1 U2.6 | length 1585.8
  Top Layer w10: v1(2485,2600) 2571.57,2686.57 2571.57,2896.74 2525,2943.31 2525,3398.66 U2.6
  Bottom Layer w10: P2.1 2450.28,2046.5 2450.28,2080.74 2485,2115.46 v1(2485,2600)
LEDOUT_3: P3.1 U3.6 | length 1679.5
  Top Layer w10: v1(2645,2600) 2645,2912.46 2676.14,2943.6 2676.14,3160.68 2710.45,3195 2753.69,3195 2878.69,3320 2878.69,3343.5 U3.6
  Bottom Layer w10: P3.1 2608.9,2046.5 2608.9,2080.74 2648.9,2120.74 2648.9,2592.85 2645,2596.75 v1(2645,2600)
LEDOUT_4: P4.1 U4.6 | length 1803.2
  Top Layer w10: v1(2780,2600) 2901.15,2721.15 2924.43,2721.15 3067.95,2864.67 3067.95,3143.64 3119.31,3195 3168.38,3195 3298.38,3325 3298.38,3354.32 U4.6
  Bottom Layer w10: P4.1 2767.52,2046.5 2767.52,2080.74 2787.52,2100.74 2787.52,2589.23 2780,2596.75 v1(2780,2600)
LEDOUT_5: P5.1 U5.6 | length 2218.6
  Top Layer w10: v1(2900,2540) 3153.28,2540 3411.57,2798.29 3411.57,2902.74 3387.76,2926.56 3387.76,3263.44 3476.81,3352.5 3476.81,3386.87 3532.7,3442.76 3558.64,3442.76 3604.11,3488.23 U5.6
  Bottom Layer w10: P5.1 2926.14,2046.5 2926.14,2080.74 2946.14,2100.74 2946.14,2339.26 2900,2385.4 v1(2900,2540)
LEDOUT_6: P6.1 U6.6 | length 2195.1
  Top Layer w10: v1(3125,2255) 3125,2340 v1(3170,2385) ; v1(3185,2470) 3187.3,2472.3 3187.3,2479.02 3344.42,2636.15 3699.43,2636.15 3885.67,2822.39 3885.67,3143.64 3942.5,3200.47 3985.74,3200.47 4113.18,3327.91 4113.18,3351.41 U6.6
  Bottom Layer w10: P6.1 3084.76,2046.5 3084.76,2080.74 3125,2120.98 v1(3125,2255) ; v1(3170,2385) 3170,2451.75 3185,2466.75 v1(3185,2470)
LEDOUT_7: P7.1 U7.6 | length 1875.3
  Bottom Layer w10: U7.6 2255.61,2995.1 2255.61,2940.99 2296.12,2900.47 2422.39,2900.47 2442.39,2880.47 2802.61,2880.47 2813.59,2891.46 2944.5,2891.46 3274.61,2561.35 3274.61,2111.96 3243.39,2080.74 3243.39,2046.5 P7.1
LEDOUT_8: P8.1 U8.6 | length 1733.9
  Bottom Layer w10: U8.6 2668.94,2990.63 2906.65,2990.63 3016.8,2880.47 3159.01,2880.47 3180.15,2901.61 3334.35,2901.61 3391.57,2844.39 3391.57,2816.1 3422.01,2785.67 3422.01,2100.74 3402.01,2080.74 3402.01,2046.5 P8.1
LEDOUT_9: P9.1 U9.6 | length 1429.6
  Bottom Layer w10: U9.6 3063.95,3004.47 3204.5,3004.47 3205.66,3005.63 3324.93,3005.63 3380,2950.56 3380,2922.28 3448.64,2853.64 3448.64,2815.61 3580.63,2683.62 3580.63,2100.74 3560.63,2080.74 3560.63,2046.5 P9.1
LEDOUT_10: P10.1 U10.6 | length 1216.2
  Bottom Layer w10: U10.6 3487.76,2989.53 3559.59,2989.53 3585.67,2963.44 3585.67,2960.66 3654.99,2891.34 3659.68,2891.34 3704.61,2846.41 3704.61,2458.87 3739.25,2424.22 3739.25,2100.74 3719.25,2080.74 3719.25,2046.5 P10.1
LEDOUT_11: P11.1 U11.6 | length 1067.8
  Bottom Layer w10: U11.6 3897.87,2988.27 3897.87,2100.74 3877.87,2080.74 3877.87,2046.5 P11.1
LEDOUT_12: P12.1 U12.6 | length 1161.3
  Bottom Layer w10: P12.1 4251.26,2261.26 4251.26,2616.65 4294.53,2659.91 4294.53,3000.47 U12.6
NetLED1_2: LED1.2 R25.1 | length 105
  Top Layer w10: LED1.2 4411.34,2215 R25.1 ; R25.1@4498.11,2203.66 R25.1@4505,2210.55
NetLED2_2: LED2.2 R26.1 | length 102.9
  Top Layer w10: LED2.2 4166.89,2210.55 R26.1
NetR1_2: R1.2 R2.2 U1.2 | length 395.3
  Bottom Layer w10: U1.2 1937.19,3619.71 1937.19,3639.45 2080,3782.25 R1.2 2090.61,3783.15 2110.3,3802.83 R2.2
NetR3_2: R3.2 R4.2 U2.2 | length 378.3
  Bottom Layer w10: U2.2 2460,3733.66 R3.2 2470.61,3783.15 2490.3,3802.83 R4.2
NetR5_2: R5.2 R6.2 U3.2 | length 366.4
  Bottom Layer w10: U3.2 2840,3704.8 R5.2 2850.61,3783.15 2870.3,3802.83 R6.2
NetR7_2: R7.2 R8.2 U4.2 | length 356.7
  Bottom Layer w10: U4.2 3235,3690.94 R7.2 3245.61,3780 3263.45,3797.83 R8.2
NetR9_2: R9.2 R10.2 U5.2 | length 357.2
  Bottom Layer w10: U5.2 3645,3692.09 R9.2 3655.61,3780 3673.45,3797.83 R10.2
NetR11_2: R11.2 R12.2 U6.2 | length 355.6
  Bottom Layer w10: U6.2 4050,3688.23 R11.2 4060.61,3780 4078.45,3797.83 R12.2
NetR13_2: R13.2 R14.2 U7.2 | length 473.7
  Top Layer w10: U7.2 1985,3065.71 1985,2866.85 R13.2 2010.61,2851.85 2030.3,2832.17 R14.2
  Bottom Layer w10: R13.2@1994.57,2857.28 R13.2 R13.2@2010.61,2851.85
NetR15_2: R15.2 R16.2 U8.2 | length 481.8
  Top Layer w10: U8.2 2395,3064.57 2395,2871.85 R15.2 2425.61,2851.85 2445.3,2832.17 R16.2
  Bottom Layer w10: U8.2 U8.2@2327.84,3145 ; R15.2 R15.2@2425.61,2851.85
NetR17_2: R17.2 R18.2 U9.2 | length 477.1
  Top Layer w10: U9.2 2805,3063.43 2805,2876.85 R17.2 2840.61,2851.85 2860.3,2832.17 R18.2
  Bottom Layer w10: R17.2@2830,2857.86 R17.2 R17.2@2840.61,2851.85
NetR19_2: R19.2 R20.2 U10.2 | length 472.3
  Top Layer w10: U10.2 3215,3062.28 3215,2870 R19.2 3245.34,2850 3268.18,2827.17 R20.2
  Bottom Layer w10: R19.2 R19.2@3245.34,2850
NetR21_2: R21.2 R22.2 U11.2 | length 478.7
  Top Layer w10: U11.2 3594.01,3092.13 3594.01,2900.99 R21.2 3655.61,2850 3673.45,2832.17 R22.2
  Bottom Layer w10: R21.2@3639.57,2855.43 R21.2 R21.2@3655.61,2850
NetR23_2: R23.2 R24.2 U12.2 | length 468.3
  Top Layer w10: U12.2 4050,3045 R23.2 4060.61,2851.85 4080.3,2832.17 R24.2
  Bottom Layer w10: R23.2 R23.2@4060.61,2851.85
pads on no net: U1.1 U1.5 U1.8 U2.1 U2.5 U2.8 U3.1 U3.5 U3.8 U4.1 U4.5 U4.8 U5.1 U5.5 U5.8 U6.1 U6.5 U6.8 U7.1 U7.5 U7.8 U8.1 U8.5 U8.8 U9.1 U9.5 U9.8 U10.1 U10.5 U10.8 U11.1 U11.5 U11.8 U12.1 U12.5 U12.8
copper on no net:
  other v2: 1920,1945 1920,4135 4635,4135

## Polygon pours and split planes (outlines as drawn)
GND on Top Layer (solid, pour order 0): 1840,4225 4725,4225 4725,1860 1840,1860
GND on Bottom Layer (solid, pour order 2): 4725,4225 1840,4225 1840,1860 4715,1860

## Silkscreen, mask and mechanical layers (free items; w line width, h text height)
Top Overlay:
  lines w10: 4530,2640 4545,2655 ; 4545,2555 4545,2655 ; 4560,2640 4545,2655
  text "+12V" at 4555,3725 h40
  text "GND" at 4585,2615 h40
  text "3V3" at 4580,2550 h40
  text "+12V" at 4545,2490 h40
  text "3V3" at 4170,2330 h40
  text "+12V" at 4390,2330 h40
  text "GND" at 2075,2295 h40
  text "LEDIN" at 2000,2200 h40
  text "+12V" at 2030,2105 h40
  text "OUT" at 2060,2000 h40
Bottom Overlay:
  text "EE-Emerge 2020" at 4690,2375 h40
  text "LoopMaster" at 4690,2315 h40
  text "Drum Pad" at 4690,2250 h40
  text "LED PCB v2" at 4690,2190 h40
  text "Engineered by:" at 4690,2130 h40
  text "Neil Katahira" at 4690,2060 h40
Mechanical 2:
  circle w10: c1920,4135 r60.83
  circle w10: c1920,1945 r60.83
  circle w10: c4635,4135 r60.42
  circle w10: c4635,1945 r61.03
  lines w3: 1840,1860 4715,1860 4725,1860 4725,4225 1840,4225 1840,1860